# Altium PCB assembly.PcbDoc
Units mm, origin at the board's own origin, x right, y up, seen from the top; angles counter-clockwise.
Board outline 203.4 x 281.64 mm, 2 copper layers (Top Layer, Bottom Layer); 4 components, 0 nets, 12 pads, 0 vias.
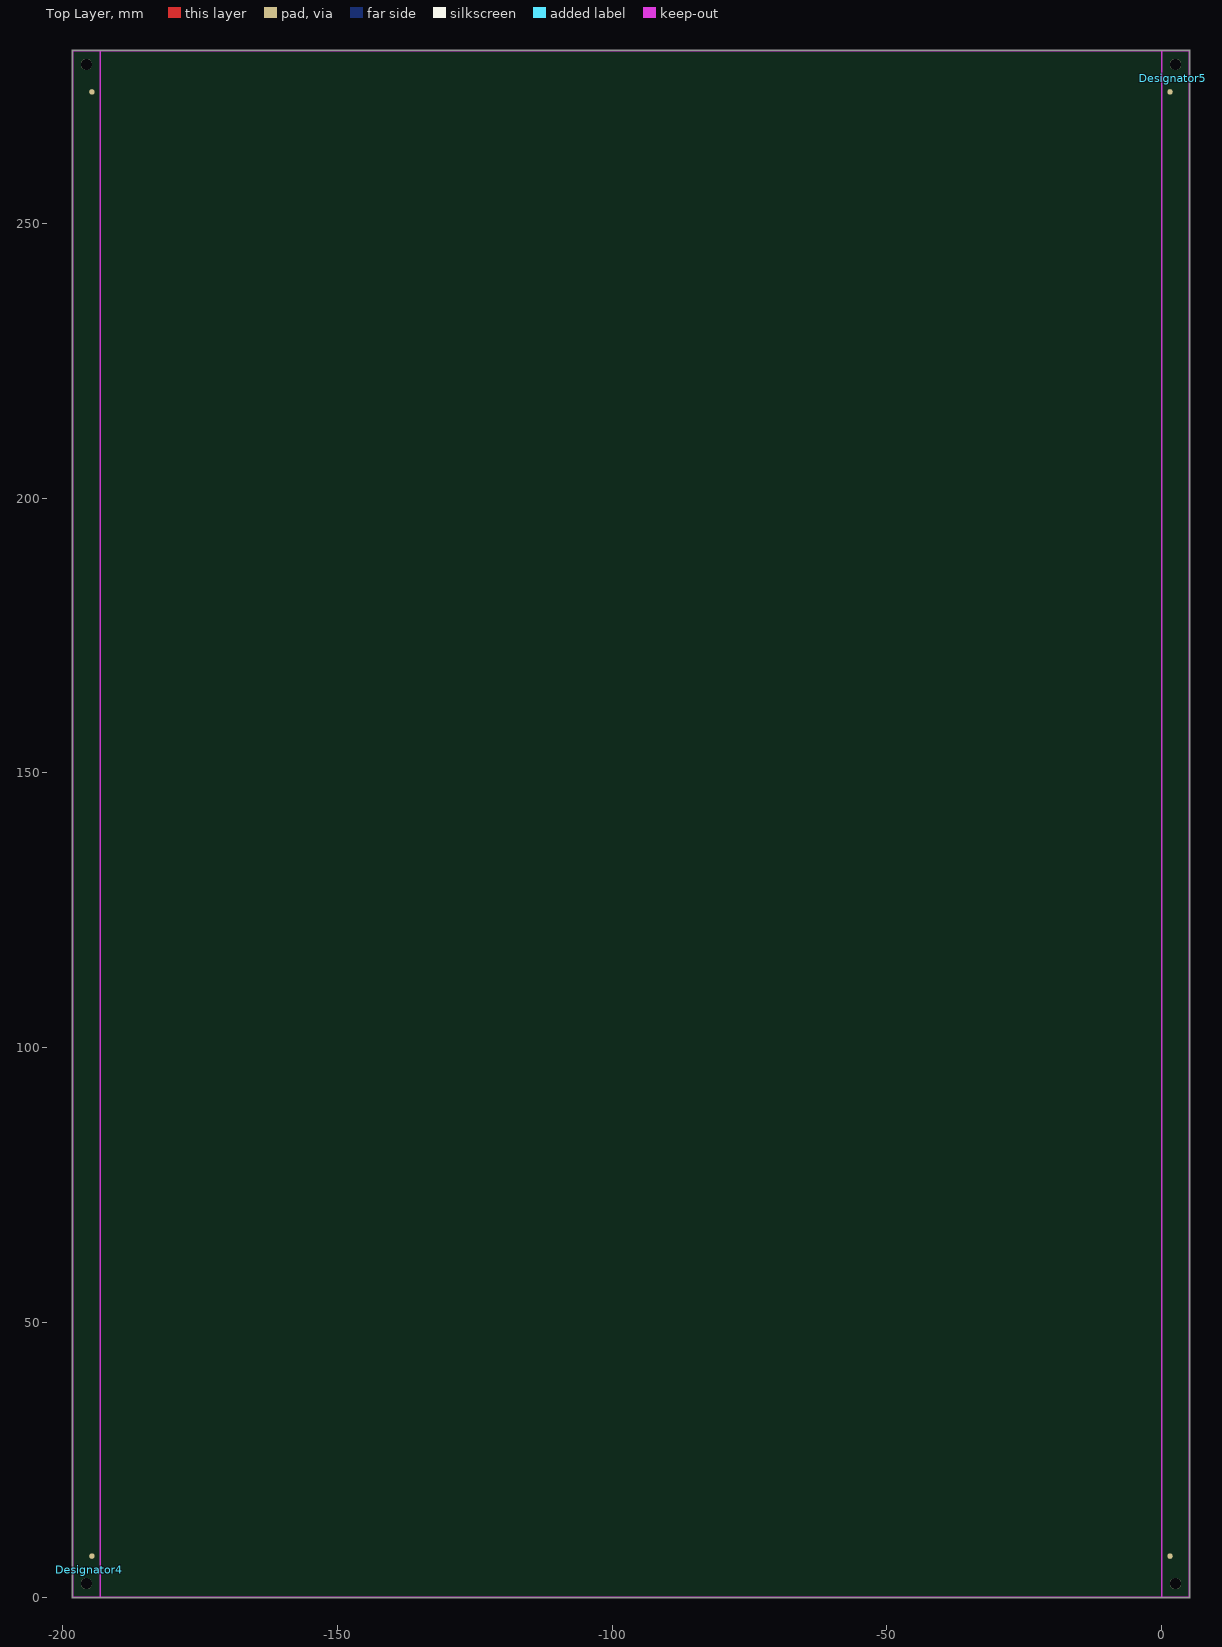
[diagram p0: Top Layer view]
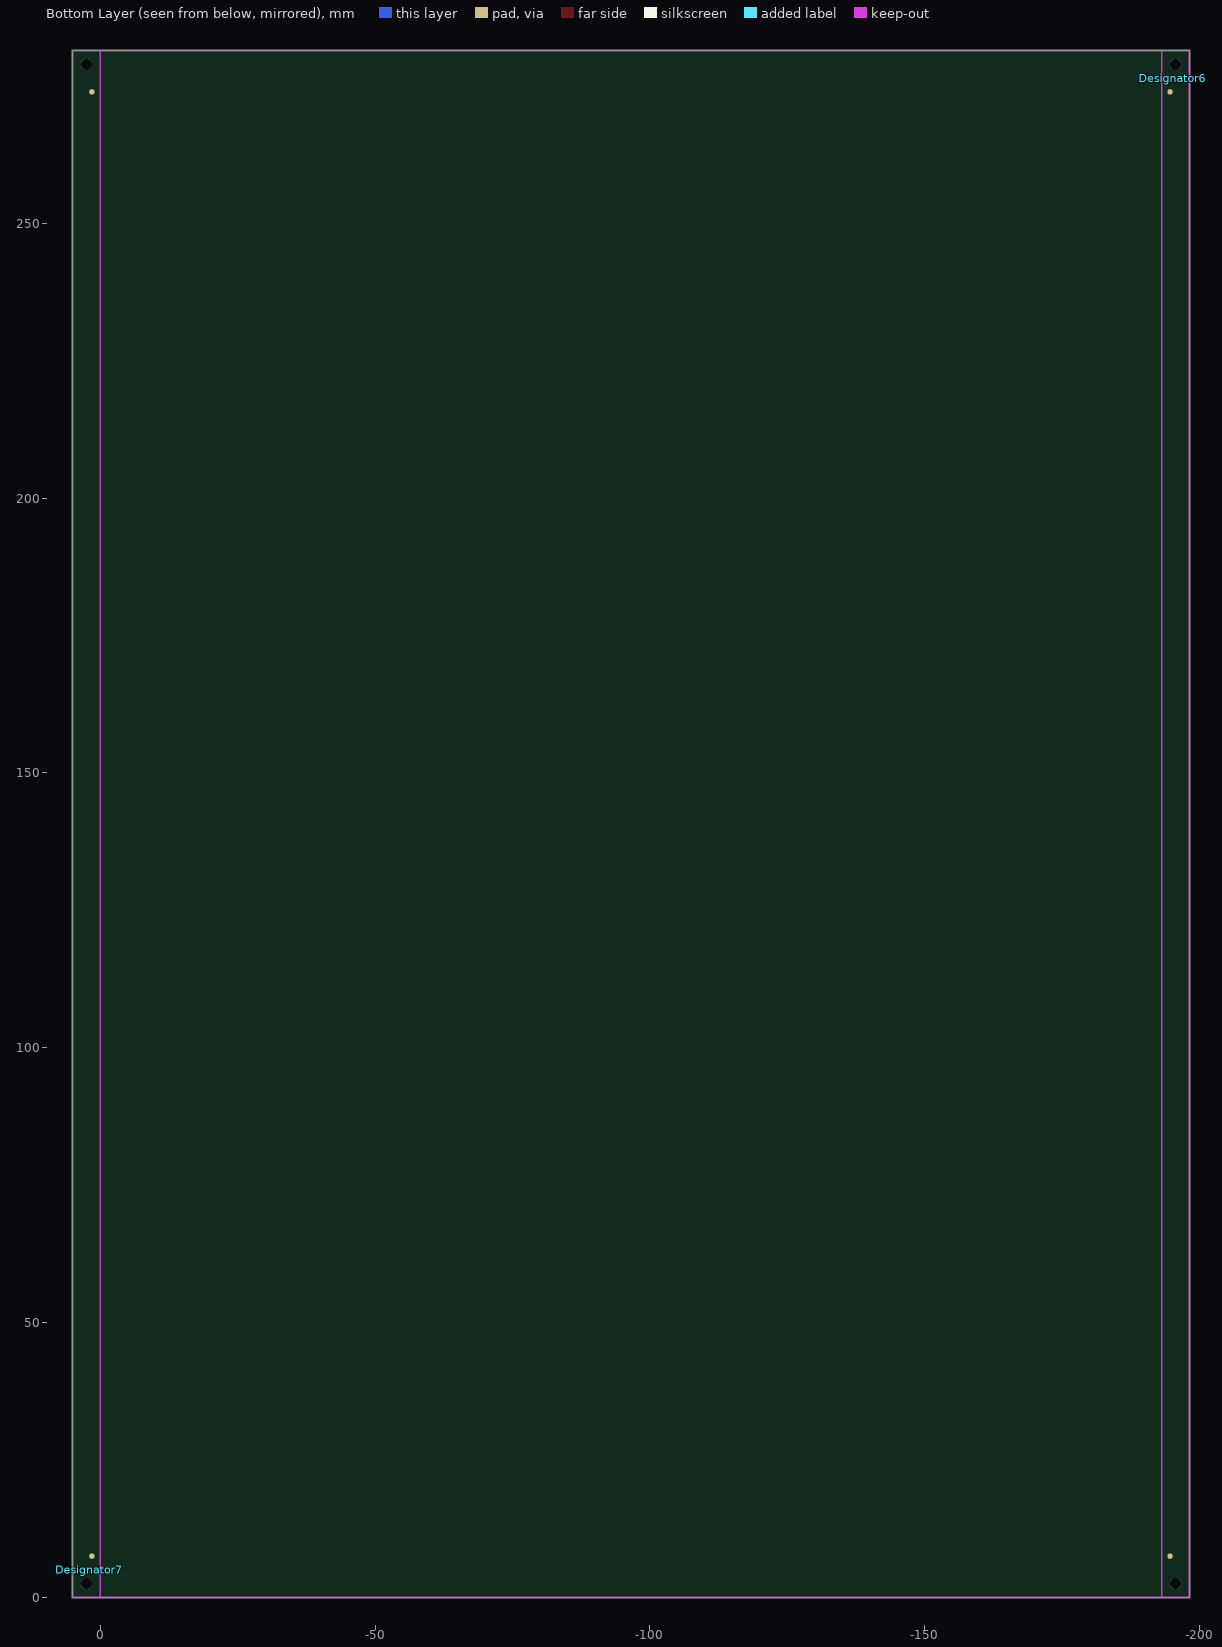
[diagram p1: Bottom Layer view, seen from below]

## Layer stack, top to bottom
Top Solder: solder mask 0.0102, Solder Resist, Dk 3.5
Top Layer: signal copper 0.0356
Dielectric 1: dielectric 0.32, FR-4, Dk 4.8
Bottom Layer: signal copper 0.0356
Bottom Solder: solder mask 0.0102, Solder Resist, Dk 3.5

## Board outline
-198.142,-0.127 cw(c-198.142,0) -198.269,0 -198.269,281.382 cw(c-198.142,281.382) -198.142,281.509 5,281.509 cw(c5,281.382) 5.127,281.382 5.127,0 cw(c5,0) 5,-0.127

## Design rules (kind name [scope] priority, off if disabled: settings)
Clearance [All] p1: gap=0.254 ignorepadtopadclearanceinfootprint=FALSE
PolygonConnect [All] p1: connectstyle=Relief reliefconductorwidth=0.254 reliefentries=4 polygonreliefangle="90 Angle" airgapwidth=0.254
RoutingVias [All] p1: holewidth=0.711 width=1.27 viastyle="Through Hole" minholewidth=0.711 minwidth=1.27 maxholewidth=0.711 maxwidth=1.27
SolderMaskExpansion [All] p1: expansion=0.102 istentingtop=FALSE
Width [All] p1: maxlimit=0.254 minlimit=0.254 preferedwidth=0.254
30 further rules are at their usual default settings.

## Components (designator, comment, footprint, x,y, rotation, side; value= is the part's Value field where it differs from the comment)
Designator4 "Comment" FM_004#1 -195.642,2.5 r0 top
Designator5 "Comment" FM_004#1 2.5,278.882 r180 top
Designator6 "Comment" FM_004#2 -195.642,278.882 r0 bottom
Designator7 "Comment" FM_004#2 2.5,2.5 r180 bottom

## Footprints (in the part's own frame and the unit in brackets; to place one, negate y for a bottom-side part, rotate by r counter-clockwise, add the part's x,y. Pads: shape width x height; smd on the part's side, far side on the other; paste and mask are expansions set on the pad)
FM_004#1 [mm]
  round 2 hole 2 unplated: 1(0,0)
  round 1 smd paste+0 mask+0.5: 1(1,5)
  round 1 smd far side paste+0 mask+0.5: 1(1,5)
FM_004#2 [mm]
  round 2 hole 2 unplated: 1(0,0)
  round 1 smd far side paste+0 mask+0.5: 1(1,5)
  round 1 smd paste+0 mask+0.051: 1(1,5)

## Nets (pads, with @x,y where several pads share a name; then routed paths per layer and width w, separated by ;. In a path a pad name is that pad's centre, name@x,y a point inside that pad or via, vN(x,y) a via of type N, cw(c..) or ccw(c..) an arc to the next point about the centre after c; other vN are vias at no path point)
pads on no net: Designator4.1 Designator5.1 Designator6.1 Designator7.1

## Keep-outs
Keep-Out Layer:
  lines w0.254: -193.142,0 -198.142,0 -198.142,281.382 5,281.382 5,0 0,0 ; -193.142,0 0,0 ; -193.142,0 -193.142,281.382 0,281.382 0,0

## Panel: embedded boards
"DSP-V1.0.PcbDoc" at -193.142,6.274, 5 rows x 2 columns, spacing 56.277 x 98, rotation 0